# Altium PCB 天地通门禁2074.PcbDoc (part 1 of 2)
Units mil, origin at the board's own origin, x right, y up, seen from the top; angles counter-clockwise.
Board outline 4047 x 2860 mil, 2 copper layers (Top Layer, Bottom Layer); 106 components, 66 nets, 310 pads, 377 vias.
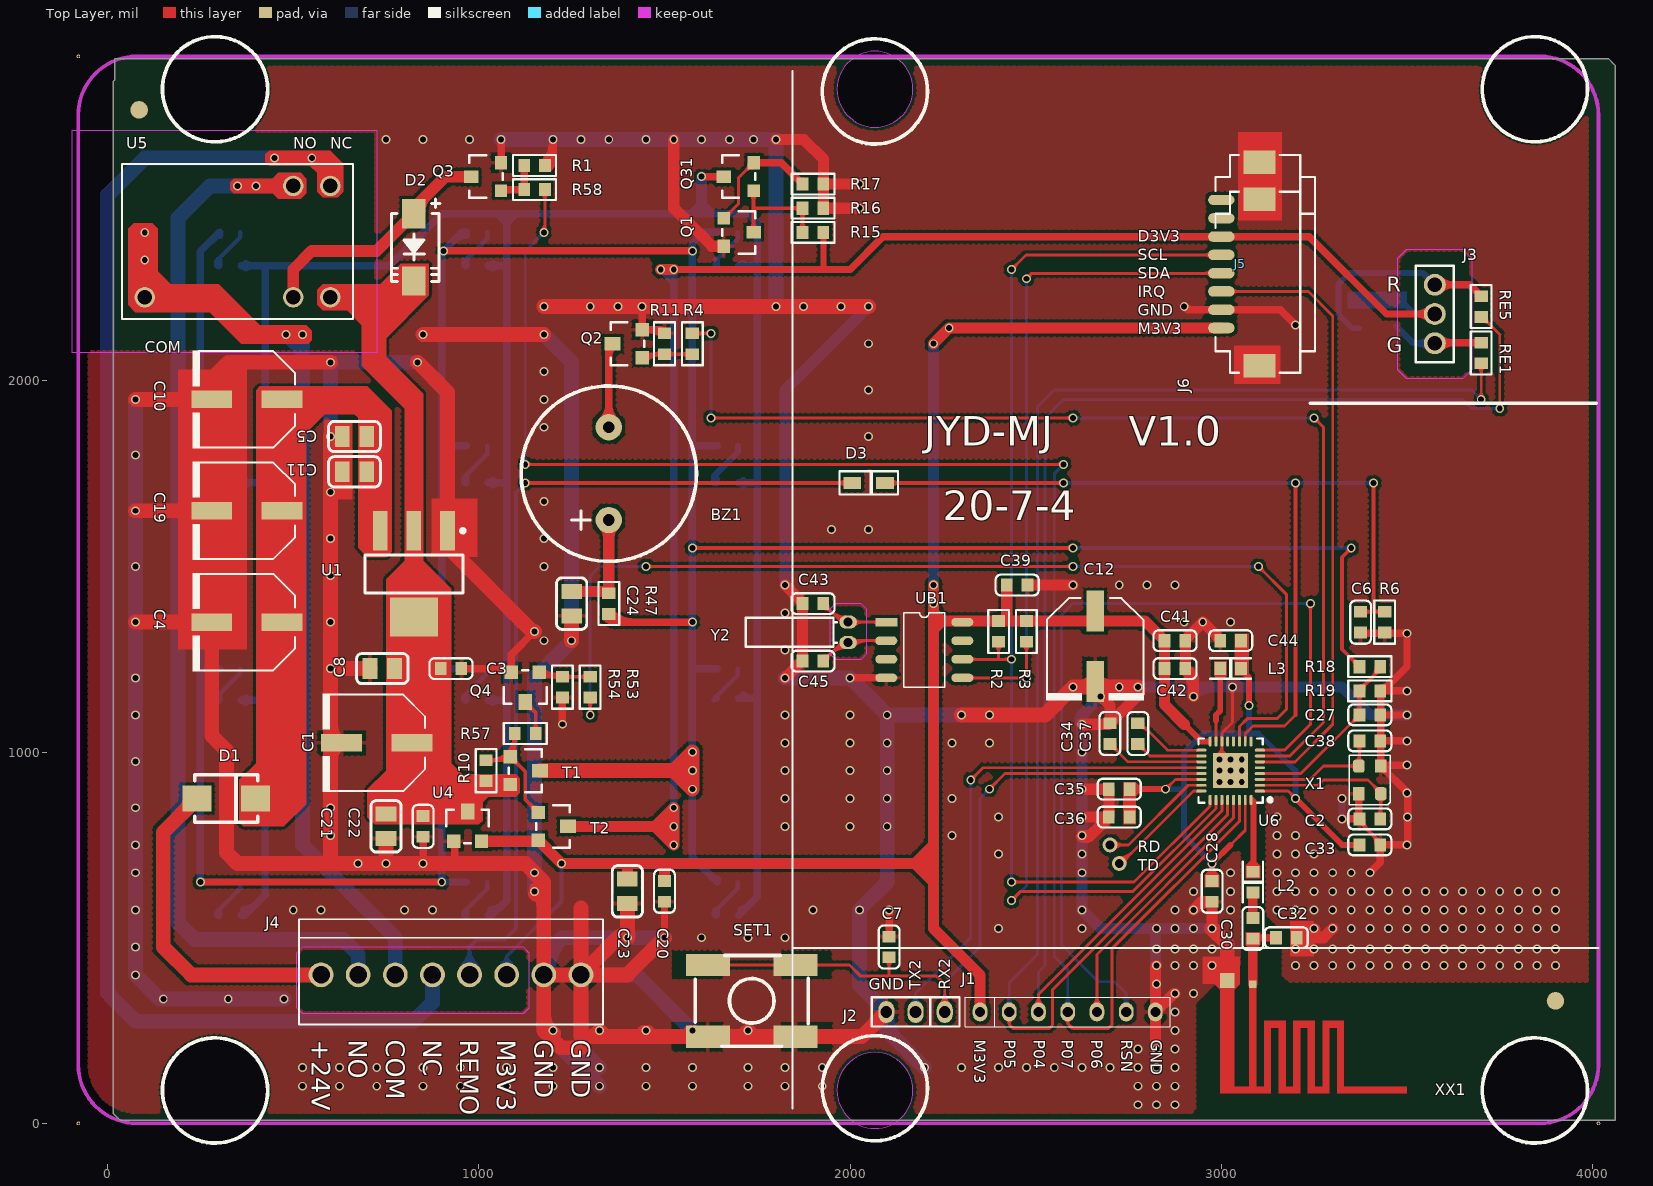
[diagram p0: Top Layer view]
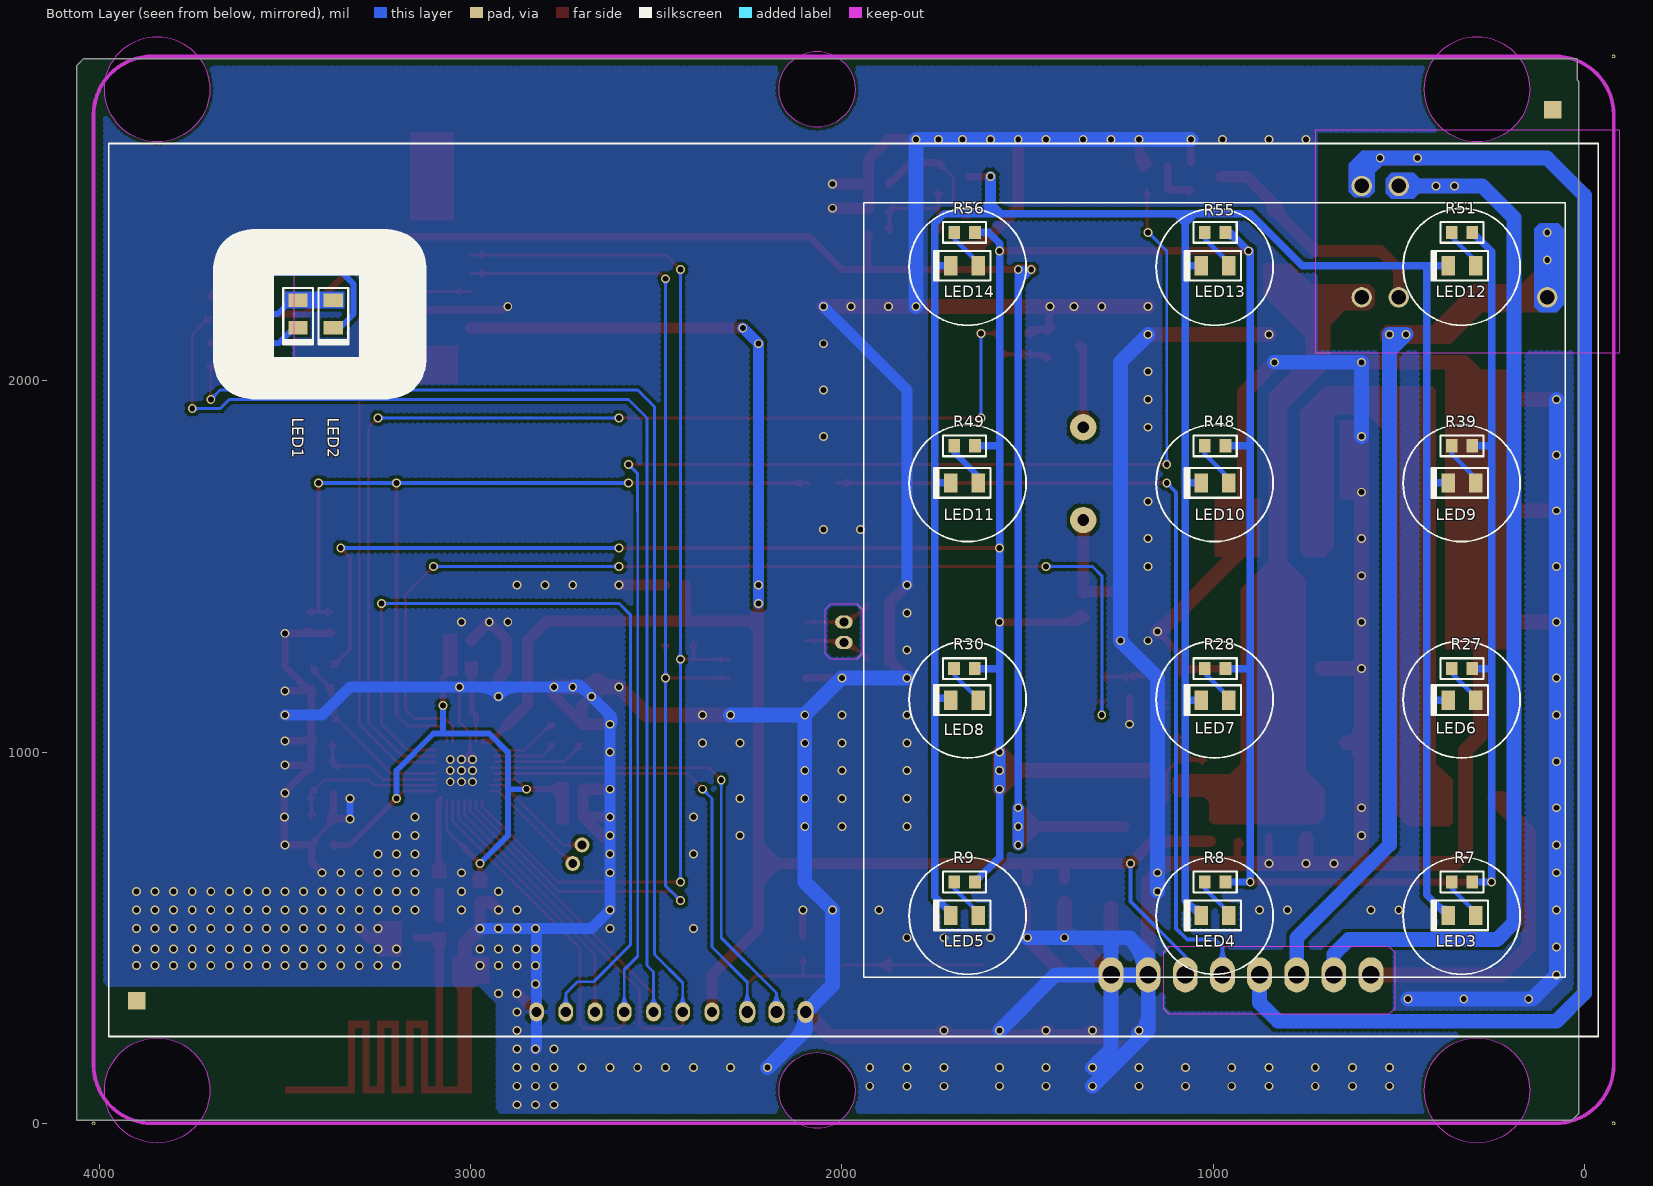
[diagram p1: Bottom Layer view, seen from below]
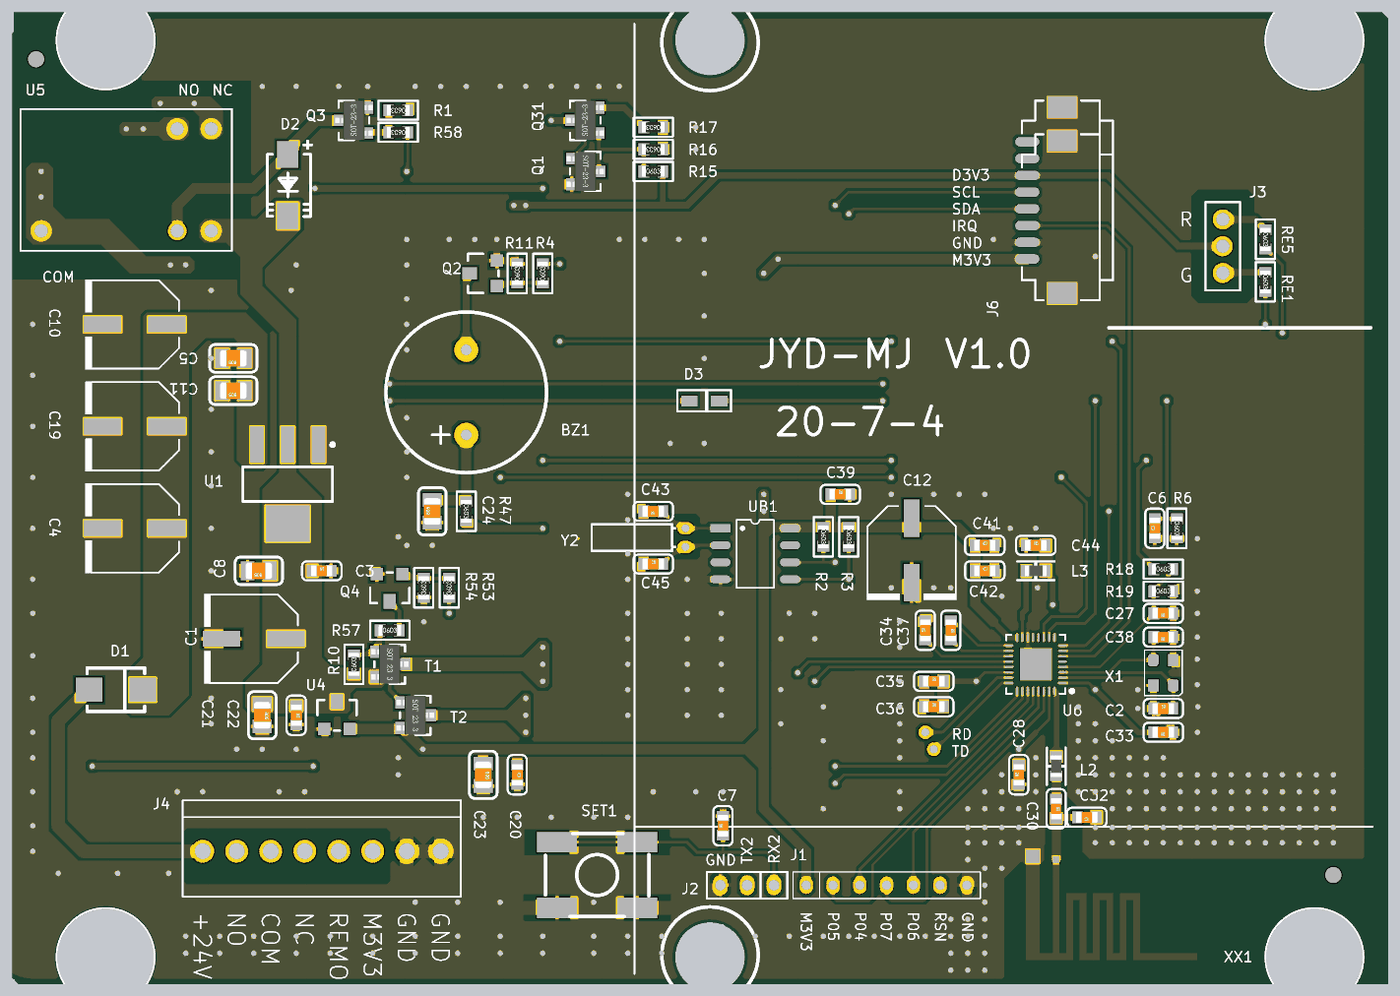
[diagram p3: 3D render of the assembled board from above, using the file's embedded part models]
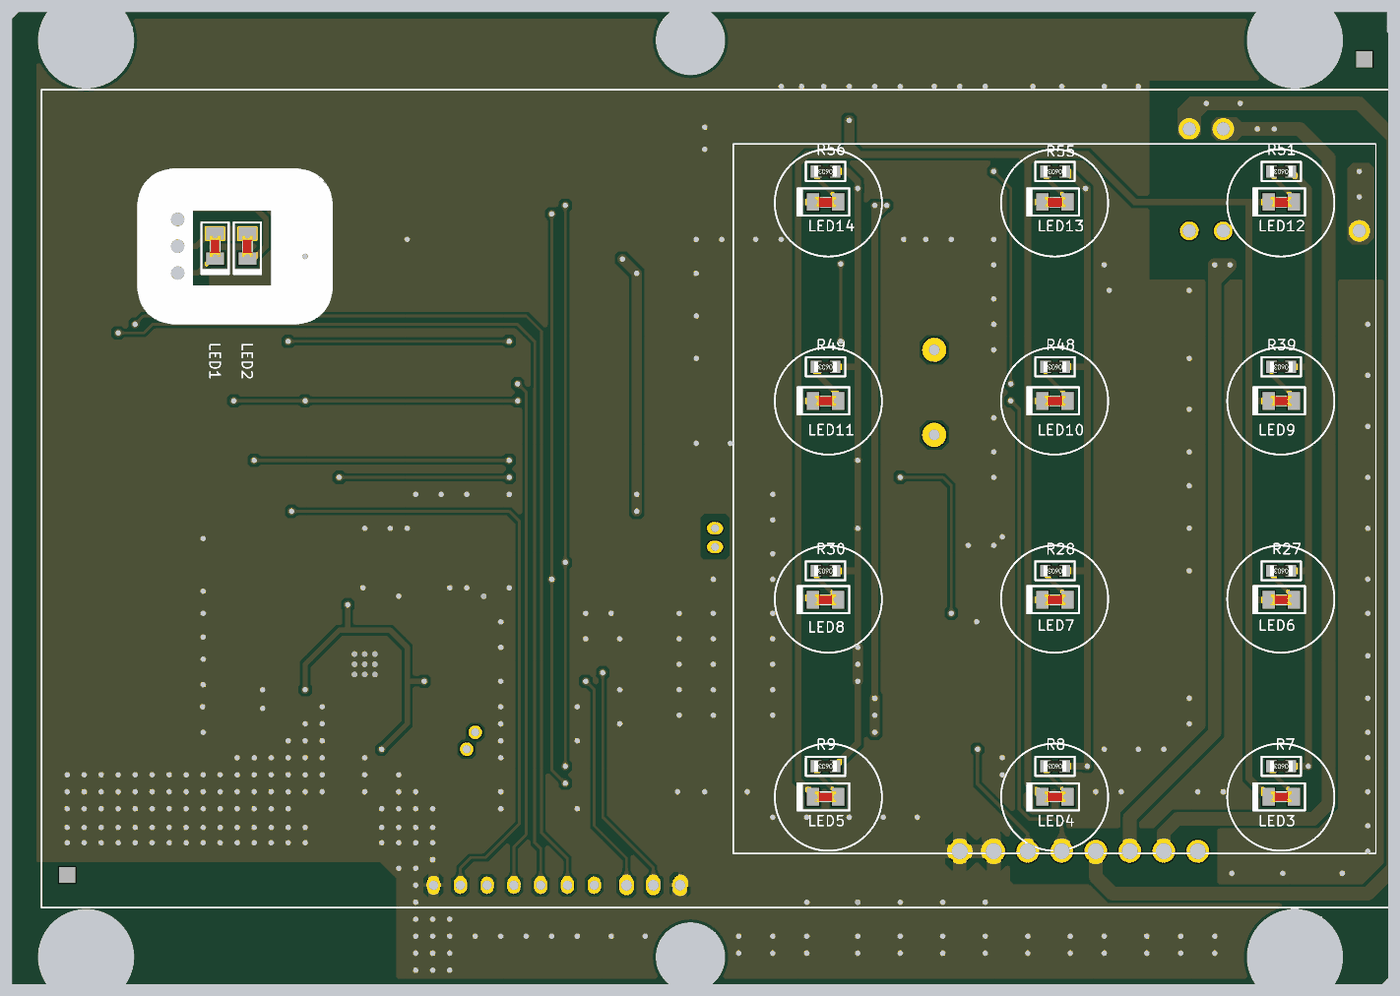
[diagram p4: 3D render of the assembled board from below, using the file's embedded part models]

## Layer stack, top to bottom
Top Layer: signal copper 1.4
Dielectric: core 12.6, FR-4, Dk 4.8
Bottom Layer: signal copper 1.4

## Board outline
19.68,2811.25 14.68,2806.25 14.68,27.25 33.68,8.25 4061.68,8.25 4061.68,2849.25 4056.68,2854.25 4042.68,2868.25 18.68,2868.25
cut-out: 2066.93,190.94 ccw(c2066.93,88.58) 1964.57,88.58 ccw(c2066.93,88.58) 2066.93,-13.78 ccw(c2066.93,88.58) 2169.29,88.58 ccw(c2066.93,88.58)
cut-out: 2066.93,2887.8 ccw(c2066.93,2785.43) 1964.57,2785.43 ccw(c2066.93,2785.43) 2066.93,2683.07 ccw(c2066.93,2785.43) 2169.29,2785.43 ccw(c2066.93,2785.43)
cut-out: 289.37,230.31 ccw(c289.37,88.58) 147.64,88.58 ccw(c289.37,88.58) 289.37,-53.15 ccw(c289.37,88.58) 431.1,88.58 ccw(c289.37,88.58)
cut-out: 289.37,2927.17 ccw(c289.37,2785.43) 147.64,2785.43 ccw(c289.37,2785.43) 289.37,2643.7 ccw(c289.37,2785.43) 431.1,2785.43 ccw(c289.37,2785.43)
cut-out: 3844.49,2927.17 ccw(c3844.49,2785.43) 3702.76,2785.43 ccw(c3844.49,2785.43) 3844.49,2643.7 ccw(c3844.49,2785.43) 3986.22,2785.43 ccw(c3844.49,2785.43)
cut-out: 3844.49,230.31 ccw(c3844.49,88.58) 3702.76,88.58 ccw(c3844.49,88.58) 3844.49,-53.15 ccw(c3844.49,88.58) 3986.22,88.58 ccw(c3844.49,88.58)

## Design rules (kind name [scope] priority, off if disabled: settings)
Clearance Clearance_1 [(InPoly)Or(IsKeepOut) vs (InPoly)Or(IsKeepOut)] p1: gap=20
Clearance [All] p2: gap=7.87
ComponentClearance [All] p1: gap=0 collisioncheckmode=3 verticalgap=0 showdistances=FALSE
FabricationTestpoint [(IsPad And (OnTopLayer Or OnBottomLayer))] p1: side=3 testpointundercomponent=TRUE minsize=40 maxsize=100 preferedsize=60 minholesize=0 maxholesize=40 preferedholesize=32 testpointgrid=1 allowsidetop=TRUE allowsidebottom=TRUE usegrid=TRUE gridtolerance=0.01
HoleSize [All] p1: absolutevalues=TRUE maxlimit=393.7 minlimit=1 maxpercent=80.000 minpercent=20.000
MinimumSolderMaskSliver [All] p1: minsoldermaskwidth=0
PolygonConnect PolygonConnect_2 [IsVia] p1: connectstyle=Direct reliefconductorwidth=10 reliefentries=4 polygonreliefangle="90 Angle" airgapwidth=10
PolygonConnect [All] p2: connectstyle=Relief reliefconductorwidth=10 reliefentries=4 polygonreliefangle="90 Angle" airgapwidth=10
RoutingVias [All] p1: holewidth=15.75 width=23.62 viastyle="Through Hole" minholewidth=15.75 minwidth=23.62 maxholewidth=19.68 maxwidth=31.5
SilkToSilkClearance [All] p1: silktosilkclearance=0
SilkToSolderMaskClearance [IsPad] p1: minsilkscreentomaskgap=0 clearancetoexposedcopper=TRUE
SolderMaskExpansion [All] p1: expansion=4
Width [All] p1: maxlimit=78.74 minlimit=3.94 preferedwidth=7.87
22 further rules are at their usual default settings.

## Components (designator, comment, footprint, x,y, rotation, side; value= is the part's Value field where it differs from the comment)
BZ1 "BUZZER" BUZZ_EN 1350,1625 r90 top
C1 "10uF" R6.3*5.8 725,1025 r180 top
C2 "12pF" 0603C 3400,820 r0 top
C3 "0.1uF" 0603C 925,1225 r0 top
C4 "47uF/50V" R6.3*7.7 375,1350 r180 top (schematic designator C2)
C5 "0.1uF/50V" 0805C 665,1850 r180 top
C6 "10nF" 0603C 3375,1350 r90 top
C7 "1nF/6.3V" 0603C 2105,475 r90 top
C8 "10uF" 0805C 740,1225 r180 top
C10 "100UF/50V" R6.3*7.7 375,1950 r180 top (schematic designator C4)
C11 "0.1uF/50V" 0805C 665,1755 r180 top
C12 "220uF/6.3V" R6.3*5.8 2660,1285 r270 top
C19 "47uF/50V" R6.3*7.7 375,1650 r180 top (schematic designator C3)
C20 "0.1uF" 0603C 1500,625 r270 top
C21 "22uF/10V" 0805C 750,800 r270 top
C22 "0.1uF" 0603C 850,800 r270 top
C23 "10uF/10V" 0805C 1400,625 r270 top
C24 "10uF/10V" 0805C 1250,1400 r90 top
C27 "1nF" 0603C 3400,1100 r180 top
C28 "1uF/6.3V" 0603C 2975,625 r90 top
C30 "1.5pF" 0603C 3085,525 r270 top
C32 "1pF" 0603C 3175,500 r180 top
C33 "0.1uF" 0603C 3400,750 r180 top
C34 "0.1uF" 0603C 2700,1050 r90 top
C35 "1uF" 0603C 2725,900 r0 top
C36 "0.1uF" 0603C 2725,825 r0 top
C37 "0.1uF" 0603C 2775,1050 r270 top
C38 "12pF" 0603C 3400,1030 r180 top
C39 "0.1uF" 0603C 2450,1450 r0 top
C41 "10uF/6.3V" 0603C 2875,1300 r0 top
C42 "0.1uF" 0603C 2875,1225 r0 top
C43 "22pF" 0603C 1900,1400 r180 top
C44 "10uF/6.3V" 0603C 3025,1300 r0 top
C45 "22pF" 0603C 1900,1245 r0 top
D1 "SS14" DO-214AA 319.68,875 r180 top
D2 "1N4001" M7 825,2450 r270 top (schematic designator D7)
D3 "1N4148" SOD-323 2050,1725 r0 top
J1 "7P" 7P-2.0MM 2350,300 r0 top
J2 "Header 3" 3P-2.0MM 2255,300 r180 top (schematic designator P4)
J3 "Header 3" 3PIN-2.0 3575,2180 r270 top
J4 "2.54接插座" 2.54螺丝接线座8P 1275,400 r180 top (schematic designator P1)
J5 "Header 8" 8P-1.25mm 3000,2315 r90 top
J6 "Header 6" 6P-1.25mm 3000,2265 r90 top
L2 "2nH" 0603L 3085,650 r90 top
L3 "2.2uH" 0603L 3025,1225 r180 top
LED1 "Green" 0805LED 3465,2180 r270 bottom
LED2 "Red" 0805LED 3370,2180 r270 bottom
LED3 "Blue" 0805LED 329.68,560 r0 bottom
LED4 "Blue" 0805LED 994.68,560 r0 bottom
LED5 "Blue" 0805LED 1669.68,560 r0 bottom
LED6 "Blue" 0805LED 329.68,1140 r0 bottom
LED7 "Blue" 0805LED 994.68,1140 r0 bottom
LED8 "Blue" 0805LED 1670,1140 r0 bottom
LED9 "Blue" 0805LED 329.68,1725 r0 bottom
LED10 "Blue" 0805LED 994.68,1725 r0 bottom
LED11 "Blue" 0805LED 1669.68,1725 r0 bottom
LED12 "Blue" 0805LED 329.68,2310 r0 bottom
LED13 "Blue" 0805LED 994.68,2310 r0 bottom
LED14 "Blue" 0805LED 1669.68,2310 r0 bottom
Q1 "SS8050" "SOT-23 - BCE" 1700,2400 r270 top (schematic designator Q31)
Q2 "SS8050" SOT-23-3L 1400,2100 r90 top (schematic designator T1)
Q3 "SS8050" "SOT-23 - BCE" 1019.68,2550 r90 top
Q4 "PMBT3904" SOT-23-3L 1125,1175 r180 top (schematic designator T2)
Q31 "SS8050" "SOT-23 - BCE" 1700,2550 r90 top
R1 "15k" 0603R 1150,2580 r180 top
R2 "10K" 0603R 2400,1325 r270 top
R3 "10K" 0603R 2475,1325 r270 top
R4 "1k" 0603R 1575,2100 r90 top
R6 "10K" 0603R 3440,1350 r270 top
R7 "100R" 0603R 329.68,650 r0 bottom
R8 "100R" 0603R 994.68,650 r0 bottom
R9 "100R" 0603R 1669.68,650 r0 bottom
R10 "100K" 0603R 1019.68,950 r90 top
R11 "20K" 0603R 1500,2100 r90 top
R15 "4.7K" 0603R 1900,2400 r0 top
R16 "47K" 0603R 1900,2465 r180 top
R17 "33R" 0603R 1900,2530 r180 top (schematic designator R15)
R18 "510K%1" 0603R 3400,1230 r0 top
R19 "100K%1" 0603R 3400,1165 r0 top
R27 "100R" 0603R 329.68,1225 r0 bottom
R28 "100R" 0603R 994.68,1225 r0 bottom
R30 "100R" 0603R 1670,1225 r0 bottom
R39 "100R" 0603R 329.68,1825 r0 bottom
R47 "10R" 0603R 1350,1400 r270 top
R48 "100R" 0603R 994.68,1825 r0 bottom
R49 "100R" 0603R 1669.68,1825 r0 bottom
R51 "100R" 0603R 329.68,2400 r0 bottom
R53 "4.7K" 0603R 1300,1175 r90 top
R54 "20K" 0603R 1225,1175 r90 top
R55 "100R" 0603R 994.68,2400 r0 bottom
R56 "100R" 0603R 1669.68,2400 r0 bottom
R57 "1K" 0603R 1125,1050 r0 top
R58 "1k" 0603R 1150,2515 r180 top
RE1 "1K" 0603R 3700,2075 r270 top
RE5 "1K" 0603R 3700,2200 r270 top
SET1 "SW-PB" KEY-S 1735,330 r180 top
T1 "SI2301" "SOT-23 - GDS" 1125,950 r270 top (schematic designator Q1)
T2 "SI2301" "SOT-23 - GDS" 1200,800 r270 top (schematic designator Q2)
U1 "AMS1117-5" SOT223_M 825,1480 r270 top
U4 "HT7533" SOT-23-3L 969.68,800 r0 top
U5 "5V" 继电器1X 600,2225 r180 top
U6 "BK3431Q" QFN32_4*4*0.4 3025,950 r180 top
UB1 "PCF8563" SOP8 2200,1275 r0 top
X1 "16MHZ" XTAL3225 3400,925 r90 top
XX1 "TIANX" BT_NAMI_1 3085,375 r180 top
Y2 "32.768KHZ" 晶振-9 1994.68,1295 r90 top

## Footprints (in the part's own frame and the unit in brackets; to place one, negate y for a bottom-side part, rotate by r counter-clockwise, add the part's x,y. Pads: shape width x height; smd on the part's side, far side on the other; paste and mask are expansions set on the pad)
2.54螺丝接线座8P [mm]
  round 1.7 / inner round 1.7 / far side oval 1.7x2.4 hole 1.2: 1(0,0) 2(2.54,0) 3(5.08,0) 4(7.62,0) 5(10.16,0) 6(12.7,0) 7(15.24,0) 8(17.78,0)
  silkscreen extent -1.5,-3.8 19.28,3.4
3P-2.0MM [mm]
  oval 1.1x1.5 hole 0.8 mask+0.05: 1(0,0) 2(2,0) 3(4,0)
  silkscreen extent -1,-1 5,1
3PIN-2.0 [mm]
  round 1.5 hole 1: 1(-2,0) 2(0,0) 3(2,0)
  silkscreen extent -3.3,-1.3 3.3,1.3
6P-1.25mm [mm]
  oval 0.7x1.8 smd mask+0.05: 1(-3.125,0) 2(-1.875,0) 3(-0.625,0) 4(0.625,0) 5(1.875,0) 6(3.125,0)
  rect 1.6x2.2 smd mask+0.05: 7(-5.7,-2.6) 8(5.7,-2.6)
  silkscreen extent -6.2,-6.4 6.2,0.4
7P-2.0MM [mm]
  oval 1x1.3 hole 0.7 mask+0.05: 1(0,0) 2(2,0) 3(4,0) 4(6,0) 5(8,0) 6(10,0) 7(12,0)
  silkscreen extent -1,-1 13,1
8P-1.25mm [mm]
  oval 0.7x1.8 smd mask+0.05: 1(-4.375,0) 2(-3.125,0) 3(-1.875,0) 4(-0.625,0) 5(0.625,0) 6(1.875,0) 7(3.125,0) 8(4.375,0)
  rect 1.6x2.2 smd mask+0.05: 9(-6.95,-2.6) 10(6.95,-2.6)
  silkscreen extent -7.45,-6.4 7.45,0.4
0603C [mm]
  rect 0.8x0.9 smd: 1(-0.711,0) 2(0.711,0)
  silkscreen extent -1.47,-0.71 1.47,0.71, body extent -0.8,-0.4 0.8,0.4, height 0.3
0603L [mm]
  rect 0.8x0.9 smd: 1(-0.711,0) 2(0.711,0)
  silkscreen extent -1.4,-0.7 1.4,0.7, body extent -0.82,-0.41 0.83,0.41, height 0.46
0603R [mm]
  rect 0.8x0.9 smd: 1(-0.711,0) 2(0.711,0)
  silkscreen extent -1.47,-0.71 1.47,0.71, body extent -0.85,-0.4 0.85,0.4, height 0.56
0805C [mil]
  rect 40x56 smd: 1(-33,0) 2(33,0)
  silkscreen extent -70,-41 70,41, body extent -39,-25 39,25, height 30
0805LED [mil]
  rect 36x52 smd: 1(-37,0) 2(37,0)
  silkscreen extent -70,-40 82,40, body extent -31,-16 31,16, height 24
BT_NAMI_1 [mm]
  rect 0.5x0.5 smd: 1(0,0)
  rect 1x1 smd: 2(1.75,-0.25)
  Top Layer region: -10.55,7 -5.75,7 -5.75,7.5 -10.55,7.5
  Top Layer region: -6.25,2.5 -5.75,2.5 -5.75,7.5 -6.25,7.5
  Top Layer region: -6.25,2.5 -4.75,2.5 -4.75,3 -6.25,3
  Top Layer region: -5.25,2.5 -4.75,2.5 -4.75,7.5 -5.25,7.5
  Top Layer region: -5.25,7 -3.75,7 -3.75,7.5 -5.25,7.5
  Top Layer region: -4.25,2.5 -3.75,2.5 -3.75,7.5 -4.25,7.5
  Top Layer region: -4.25,2.5 -2.75,2.5 -2.75,3 -4.25,3
  Top Layer region: -3.25,2.5 -2.75,2.5 -2.75,7.5 -3.25,7.5
  Top Layer region: 1.25,0 2.25,0 2.25,7.5 1.25,7.5
  Top Layer region: -0.25,0 0.25,0 0.25,7.5 -0.25,7.5
  Top Layer region: -1.25,7 2.25,7 2.25,7.5 -1.25,7.5
  Top Layer region: -1.25,2.5 -0.75,2.5 -0.75,7.5 -1.25,7.5
  Top Layer region: -2.25,2.5 -0.75,2.5 -0.75,3 -2.25,3
  Top Layer region: -2.25,2.5 -1.75,2.5 -1.75,7.5 -2.25,7.5
  Top Layer region: -3.25,7 -1.75,7 -1.75,7.5 -3.25,7.5
BUZZ_EN [mm]
  round 1.8 hole 0.8: 1(0,0) 2(6.35,0)
  silkscreen extent -2.82,-6 9.17,6
DO-214AA [mm]
  rect 2x1.8 smd: 1(2,0) 2(-2,0)
  silkscreen extent -2.15,-1.63 2.15,1.63
KEY-S [mm]
  rect 3x1.524 smd: 1(3,2.45) 1/2(-3,2.45) 2(-3,-2.45) 2/2(3,-2.45)
  silkscreen extent -3.86,-3.1 3.86,3.1
M7 [mm]
  rect 2x1.6 smd: A(0,0) K(4.6,0)
  silkscreen extent -1,-1.53 4.64,1.78
QFN32_4*4*0.4 [mm]
  rect 2.4x2.4 smd paste-0.025 mask+0.051: 0(0,0)
  oval 0.7x0.2 smd paste-0.025 mask+0.051: 1(-2,1.4) 2(-2,1) 3(-2,0.6) 4(-2,0.2) 5(-2,-0.2) 6(-2,-0.6) 7(-2,-1) 8(-2,-1.4) 17(2,-1.4) 18(2,-1) 19(2,-0.6) 20(2,-0.2) 21(2,0.2) 22(2,0.6) 23(2,1) 24(2,1.4)
  oval 0.2x0.7 smd paste-0.025 mask+0.051: 9(-1.4,-2) 10(-1,-2) 11(-0.6,-2) 12(-0.2,-2) 13(0.2,-2) 14(0.6,-2) 15(1,-2) 16(1.4,-2) 25(1.4,2) 26(1,2) 27(0.6,2) 28(0.2,2) 29(-0.2,2) 30(-0.6,2) 31(-1,2) 32(-1.4,2)
  silkscreen extent -2.82,-2.2 2.2,2.2
R6.3*5.8 [mm]
  rect 2.8x1.2 smd: 1(-2.4,0) 2(2.4,0)
  silkscreen extent -3.3,-3.36 3.7,3.36
R6.3*7.7 [mm]
  rect 2.8x1.2 smd: 1(-2.4,0) 2(2.4,0)
  silkscreen extent -3.3,-3.36 3.7,3.36
SOD-323 [mil]
  rect 48x32 smd mask+1.97: 1(-44,0) 2(44,0)
  silkscreen extent -79,-31 79,31
SOP8 [mm]
  rect 1.5x0.6 smd mask+0.05: 1(-2.6,1.905)
  oval 1.5x0.6 smd mask+0.05: 2(-2.6,0.635) 3(-2.6,-0.635) 4(-2.6,-1.905) 5(2.6,-1.905) 6(2.6,-0.635) 7(2.6,0.635) 8(2.6,1.905)
  round 0.4 on Top Overlay mask+0.05: ""(-0.949,1.905)
  silkscreen extent -1.4,-2.54 1.4,2.54
SOT223_M [mm] "SOT223, 4-Leads, Body 6.5x3.5mm, Pitch 2.3mm, Lead Span 7mm, IPC Low Density"
  rect 2.7x1 smd: 1(-2.95,2.3) 2(-2.95,0) 3(-2.95,-2.3)
  rect 2.7x3.3 smd: 4(2.95,0)
  silkscreen extent -3.07,-3.35 1.3,3.48, body extent -1.85,-3.35 1.85,3.35, height 1.7
"SOT-23 - BCE" [mm]
  rect 0.85x0.85 smd: B(-0.95,-1.016)
  rect 0.85x1 smd: C(0,1.016)
  rect 0.914x0.85 smd: E(0.95,-1.016)
  silkscreen extent -1.46,-1.14 1.46,1.14, body extent -1.45,-1.4 1.45,1.4, height 1.2
"SOT-23 - GDS" [mil]
  rect 36x43.31 smd: D(0,40)
  rect 36x36 smd: G(-37.4,-40) S(37.4,-40)
  silkscreen extent -57,-45 58,45, body extent -57,-55 57,55, height 47
SOT-23-3L [mil]
  rect 36x36 smd: 1(-37.4,-40) 2(37.4,-40)
  rect 36x43.31 smd: 3(0,40)
  silkscreen extent -57,-45 58,45
XTAL3225 [mm]
  rrect50% 0.9x0.8 smd: 1(-0.95,-0.75) 3(0.95,0.75)
  rect 0.9x0.8 smd: 2(0.95,-0.75) 4(-0.95,0.75)
  silkscreen extent -1.7,-1.4 1.7,1.4
晶振-9 [mm]
  oval 0.9x1.2 hole 0.6: 1(0,0) 2(1.4,0)
  rect 0x0 smd: 3(0.635,8)
  silkscreen extent -0.3,0.76 1.7,7
继电器1X [mm]
  round 1.4 hole 1: 1(0,-7.62) 2(0,0) 3(2.54,-7.62) 4(2.54,0) 5(12.7,0)
  silkscreen extent -1.55,-9.11 14.25,1.49

## Part data
BZ1: "Buzzer"
C1 C4 C8 C10 C12 C19 C21 C23: library part CAP-P, "Capacitor, tolerance ±20%"
C2 C6 C7 C28 C30 C32 C33 C34 C35 C36 C37 C38 C41 C42 C44: library part Cap, "Capacitor"
C3 C5 C11: library part "CAP NP"
C20 C22 C27: library part CAP-NP, "Capacitor, Ceramic"
C24: library part C_0_Dup1
C39 C43 C45: library part C
D1 D2 D3: library part D
J2 J3: "Header, 3-Pin"
J4: library part "Header 8", "Header, 8-Pin"
J5: "Header, 8-Pin"
J6: "Header, 6-Pin"
L2 L3: "Power Inductor, 4.7uH, 0.7A, 260mR DCR"
LED1 LED2 LED3 LED4 LED5 LED6 LED7 LED8 LED9 LED10 LED11 LED12 LED13 LED14: library part LED
Q1 Q3 Q31: library part PMBT3904
Q2 Q4: library part NPN_BJT, "Bipolar Junction Transistor"
R1 R6 R7 R8 R9 R10 R15 R16 R17 R27 R28 R30 R39 R48 R49 R51 R53 R54 R55 R56 R57 R58 RE1 RE5: library part R
R2 R3: library part RES
R4 R11 R47: library part R_Dup1
R18 R19: library part Res2, "Resistor"
SET1: "Switch"
T1 T2: library part PWRMOSFET_EP_DGS_0
U1 U4: library part XC6206P302M
U5: library part OMRON_G8P-1A4P
UB1: library part IC8
Y2: library part 晶振

## Free pads (board coordinates)
  round 10 hole 5: 1(-78.74,0) 2(-78.74,2874.02) 3(4015.75,0)
  round 40 hole 24: 1(2725,700) 2(2700,750)
  round 39.37 hole 118.11 unplated: 4(289.37,2785.43) 5(289.37,88.58) 6(2066.93,2785.43) 7(2066.93,88.58) 8(3844.49,2785.43) 9(3844.49,88.58)
  round 47.24 smd: MARK(85,2730) MARK(3900,330)
  rect 47.24x47.24 smd far side: MARK(85,2730) MARK(3900,330)

## Via types
v1: diameter 24, hole 16, Top Layer to Bottom Layer, tented both sides, 377 vias

## Nets (pads, with @x,y where several pads share a name; then routed paths per layer and width w, separated by ;. In a path a pad name is that pad's centre, name@x,y a point inside that pad or via, vN(x,y) a via of type N, cw(c..) or ccw(c..) an arc to the next point about the centre after c; other vN are vias at no path point)
5V: C1.1 C3.1 C8.1 C21.1 C22.1 D2.K R10.1 T1.S U1.2 U1.4 U4.3 U5.2 | length 2683.9
  Top Layer w40: U5.2@600,2225 725,2225 ; C21.1@750,833 750,875 787.6,912.6 850,912.6 ; 791.93,2235.83 cw(c825,2202.76) D2.K@825,2249.53 ; U1.4@801.56,1387.3 ccw(c744.97,1443.89) 825,1443.89 ccw(c905.03,1443.89) U1.4@848.44,1387.3 ; U1.4@813.37,1340.42 cw(c724.94,1251.99) 850,1251.99 ; D2.K@816.09,2268.28 cw(c725.01,2342.47) 725.01,2225 ; D2.K@825,2268.9 781.1,2225 725,2225 ; C1.1@827.58,1024.78 ccw(c773.47,1078.89) 850,1078.89 ; C1.1@827.58,1025.22 cw(c773.47,971.11) 850,971.11 ; C22.1@850,828 850,912.6 ; C3.1@897,1225 850,1225 ; U4.3@969.68,840 969.68,912.6 ; T1.S@1079.68,912.6 969.68,912.6 ; 725,2225 725,2050 825,1950 U1.2@825,1596.14 825,1383.86 850,1358.86 850,1225 ; 850,912.6 969.68,912.6 ; 850,912.6 850,1225
20V: C4.1 C5.1 C10.1 C11.1 C19.1 D1.2 U1.3 | length 1906.6
  Top Layer w31.5: D1.2@398.43,875 475,951.57 475,1939.17 464.17,1950 680,1950 734.45,1895.55 734.45,1850 U1.3@734.45,1616.14 ; D1.2@402.36,894.68 ccw(c402.36,932.7) D1.2@429.25,905.82 ; D1.2@422.05,875 cw(c479.08,875) 438.75,915.33 ; C4.1@463.92,1344.43 cw(c437.17,1317.68) 475,1317.68 ; C4.1@463.92,1355.57 ccw(c437.17,1382.32) 475,1382.32 ; C19.1@463.92,1644.43 cw(c437.17,1617.68) 475,1617.68 ; C19.1@463.92,1655.57 ccw(c437.17,1682.32) 475,1682.32 ; C10.1@463.92,1944.43 cw(c437.17,1917.68) 475,1917.68
24V: D1.1 J4.8 | length 930.5
  Top Layer w40: D1.1@207.88,841.93 ccw(c174.81,875) D1.1@221.57,875 ; D1.1@240.94,875 150,784.06 150,475 225,400 J4.8@575,400
BAT_ADC: C27.2 R18.2 R19.1 U6.4 | length 704.7
  Top Layer w7.87: U6.4@3093.74,942.13 3214.13,942.13 C27.2@3372,1100 ; 3348.48,1076.48 cw(c3372,1052.95) C27.2@3372,1086.22 ; 3353.23,1081.23 ccw(c3336.43,1098.03) C27.2@3360.19,1098.03
  Top Layer w10: C27.2@3364.4,1109.57 ccw(c3346.05,1127.92) 3372,1127.92 ccw(c3397.95,1127.92) C27.2@3379.6,1109.57 ; R19.1@3364.4,1155.43 cw(c3346.05,1137.08) 3372,1137.08 cw(c3397.95,1137.08) R19.1@3379.6,1155.43 ; C27.2@3372,1100 R19.1@3372,1165 3372,1167 3428,1223 R18.2@3428,1230 ; R19.1@3372,1177.72 ccw(c3372,1203.59) 3390.29,1185.29 ; R19.1@3382.75,1166.97 cw(c3408.77,1166.97) 3390.37,1185.37 ; 3406.09,1201.09 ccw(c3379.16,1228.03) R18.2@3417.25,1228.03 ; R18.2@3418.24,1213.24 cw(c3428,1203.48) R18.2@3428,1217.28
BEEP: R4.2 U6.7 | length 3239.6
  Top Layer w7.87: U6.7@3093.74,989.37 3184.37,989.37 3275,1080 3275,1875 v1(3250,1900) ; v1@3250,1891.94 cw(c3250,1872.47) 3263.76,1886.24 cw(c3277.53,1900) v1@3258.06,1900
  Top Layer w8: R4.2@1575,2128 v1(1625,2128) ; R4.2@1585.28,2119.69 cw(c1605.33,2099.64) 1605.33,2128 cw(c1605.33,2156.36) R4.2@1585.28,2136.31 ; v1@1619.34,2122.34 ccw(c1605.69,2108.69) 1605.69,2128 ccw(c1605.69,2147.31) v1@1619.34,2133.66 ; v1(1625,1900) v1(2600,1900) ; v1@1630.66,1894.34 cw(c1644.31,1880.69) 1644.31,1900 cw(c1644.31,1919.31) v1@1630.66,1905.66 ; v1@2594.34,1894.34 ccw(c2580.69,1880.69) 2580.69,1900 ccw(c2580.69,1919.31) v1@2594.34,1905.66
  Bottom Layer w8: v1@1619.34,1905.66 ccw(c1605.69,1919.31) 1625,1919.31 ccw(c1644.31,1919.31) v1@1630.66,1905.66 ; v1@1619.34,2122.34 cw(c1605.69,2108.69) 1625,2108.69 cw(c1644.31,2108.69) v1@1630.66,2122.34 ; v1(1625,1900) v1(1625,2128) ; v1(2600,1900) v1(3250,1900) ; v1@2605.66,1894.34 cw(c2619.31,1880.69) 2619.31,1900 cw(c2619.31,1919.31) v1@2605.66,1905.66 ; v1@3244.34,1894.34 ccw(c3230.69,1880.69) 3230.69,1900 ccw(c3230.69,1919.31) v1@3244.34,1905.66
COM: J4.6 U5.5 | length 2403.6
  Top Layer w39.37: U5.5@100,2225 285,2225 385,2125 v1(480,2125) v1(525,2125)
  Bottom Layer w39.37: J4.6@775,400 775,500 525,750 525,2080 ; 525,2080 v1(480,2125) v1(525,2125) 525,2080
  other v1: 100,2325 100,2400
GND: C1.2 C2.1 C3.2 C4.2 C5.2 C6.1 C7.2 C8.2 C10.2 C11.2 C12.2 C19.2 C20.2 C21.2 C22.2 C23.2 C24.1 C27.1 C28.1 C30.2 C32.1 C32.2 C33.1 C34.2 C35.1 C36.1 C38.1 C39.2 C41.2 C42.2 C43.2 C44.1 C45.1 J1.7 J2.3 J4.1 J4.2 J5.2 J5.9 J5.10 J6.2 J6.7 J6.8 Q1.E Q2.2 Q3.E Q4.2 R1.1 R6.2 R11.2 R16.1 R17.1 R19.2 R54.1 SET1.1 SET1.1/2 U1.1 U4.1 U6.0 U6.14 UB1.4 X1.2 X1.4 XX1.1 XX1.2 | length 29770.4
  Top Layer w7.87: U6.0@2989.3,985.7 ccw(c2960.14,1014.86) 3001.38,1014.86 ; U6.0@2994.87,980.13 ccw(c2979.15,995.85) U6.0@3001.38,995.85 ; U6.0@3001.38,973.62 U6.14@3001.38,1028.74 3001.38,1051.38 3030,1080 v1(3030,1175) ; v1@3024.3,1169.3 cw(c3010.53,1155.53) 3030,1155.53 cw(c3049.47,1155.53) v1@3035.7,1169.3
  Top Layer w10: C2.1@3372,807.28 cw(c3372,793.48) C2.1@3381.76,803.24 ; C2.1@3372,820 3372,813 3428,757 C33.1@3428,750 ; C2.1@3382.75,818.03 ccw(c3420.84,818.03) 3393.91,791.09 ; 3406.09,778.91 cw(c3379.16,751.97) C33.1@3417.25,751.97 ; C33.1@3418.24,766.76 ccw(c3428,776.52) C33.1@3428,762.72
  Top Layer w19.68: v1(850,700) C22.2@850,772 ; U4.1@926.51,754.23 cw(c906.03,733.75) 935,733.75 ; U4.1@932.28,760 935,757.28 935,700 ; v1(2000,1200) UB1.4@2097.64,1200
  Top Layer w20: C3.2@953,1225 Q4.2@1087.6,1225 ; 1044.14,1225 cw(c1044.14,1171.54) Q4.2@1081.94,1209.34 ; Q3.E@1054.92,2593.43 ccw(c1042.67,2605.68) 1060,2605.68 ; Q3.E@1059.68,2587.4 1060,2587.72 v1(1060,2650) ; Q4.2@1081.94,1220.66 ccw(c1068.28,1234.31) 1087.6,1234.31 ccw(c1106.91,1234.31) Q4.2@1093.25,1220.66 ; Q4.2@1087.6,1215 Q4.2@1087.6,1225 ; v1(1150,1325) 1087.6,1262.6 Q4.2@1087.6,1225 ; R1.1@1173.94,2586.03 ccw(c1111.01,2648.96) v1@1200,2648.96 ; R1.1@1178,2580 1200,2602 v1(1200,2650) ; R1.1@1178,2587.72 ccw(c1178,2606.35) R1.1@1191.17,2593.17 ; R1.1@1188.08,2571.89 ccw(c1159.29,2600.67) 1200,2600.67 ; v1(1225,1075) R54.1@1225,1147 ; Q2.2@1434.34,2143.06 ccw(c1420.69,2156.72) 1440,2156.72 ccw(c1459.31,2156.72) 1445.66,2143.06 ccw(c1459.31,2156.72) 1459.31,2137.4 ccw(c1459.31,2118.09) Q2.2@1445.66,2131.75 ; v1(1440,2200) Q2.2@1440,2137.4 1490.6,2137.4 R11.2@1500,2128 ; 1461.46,2137.4 cw(c1461.46,2091.42) R11.2@1493.97,2123.94 ; v1(1500,500) C20.2@1500,597 ; C7.2@2105,503 v1(2105,575) ; v1(2900,2200) 2908.82,2191.18 J6.2@3000,2191.18 3158.82,2191.18 v1(3200,2150) ; v1@2901.41,2201.41 ccw(c2926.12,2226.12) 2926.12,2191.18 ; C30.2@3085,497 3088,500 C32.2@3147,500 ; C30.2@3091.03,492.94 cw(c3108.09,475.88) 3108.09,500 ; v1(3325,820) C2.1@3372,820 3370.47,821.53 X1.4@3370.47,887.6 ; 3370.47,839.53 ccw(c3389.56,839.53) C2.1@3376.06,826.03 ; C6.1@3375,1322 3377,1320 v1(3500,1320) 3500,1230 R19.2@3435,1165 ; C6.1@3381.03,1326.06 ccw(c3395.67,1340.71) 3395.67,1320 ; v1(3400,675) 3428,703 C33.1@3428,750 v1(3500,750) 3501.62,751.62 3501.62,890.31 X1.2@3429.53,962.4 ; 3419.33,1320 ccw(c3419.33,1340.71) R6.2@3433.97,1326.06 ; C38.1@3423.94,1023.97 cw(c3410.44,1010.47) 3429.53,1010.47 ; C38.1@3423.94,1036.03 ccw(c3410.44,1049.53) 3429.53,1049.53 ; C27.1@3423.94,1093.97 cw(c3410.44,1080.47) 3429.53,1080.47 ; C27.1@3423.94,1106.03 ccw(c3410.44,1119.53) 3429.53,1119.53 ; R19.2@3423.94,1158.97 cw(c3410.44,1145.47) 3429.53,1145.47 ; C27.1@3428,1100 C27.1@3429.53,1100 ; R19.2@3428,1165 R19.2@3435,1165 ; R19.2@3428,1172.72 ccw(c3428,1208.25) 3453.12,1183.12 ; X1.2@3429.53,954.69 cw(c3429.53,936.06) X1.2@3442.7,949.23 ; R6.2@3446.03,1326.06 ccw(c3460.67,1340.71) 3460.67,1320 ; v1(3500,965) 3432.13,965 X1.2@3429.53,962.4 ; v1(3500,1030) C38.1@3429.53,1030 ; v1(3500,1100) C27.1@3429.53,1100 ; v1(3500,1165) R19.2@3435,1165 ; X1.2@3429.53,962.4 C38.1@3429.53,1028.47 ; C38.1@3429.53,1028.47 C38.1@3428,1030 C38.1@3429.53,1030 ; C38.1@3429.53,1028.47 C38.1@3429.53,1030 ; C38.1@3429.53,1030 C27.1@3429.53,1100 ; C27.1@3429.53,1100 3429.53,1159.53 R19.2@3435,1165
  Top Layer w26: XX1.1@3085,375 C30.2@3085,497
  Top Layer w30: v1(1525,2650) 1525,2465 1627.4,2362.6 Q1.E@1660,2362.6 ; v1(1800,2650) 1875,2650 1928,2597 R17.1@1928,2530 ; v1(1825,1200) 1870,1245 C45.1@1872,1245 C43.2@1872,1400 1872,1403 v1(1825,1450) ; v1(2025,2465) R16.1@1928,2465 R17.1@1928,2530 ; v1(2025,2530) R17.1@1928,2530 ; C39.2@2478,1450 v1(2600,1450) ; v1@2623.37,772.48 ccw(c2633.63,788.37) 2647,775 ; v1@2625,772 ccw(c2625,817.87) 2657.44,785.44 ; v1(2625,775) 2647,775 ; v1(2625,825) C36.1@2697,825 ; v1(2625,900) C35.1@2697,900 C36.1@2697,825 ; v1(2625,1075) 2697,1075 C34.2@2700,1078 ; C12.2@2660,1150.39 cw(c2660,1115.13) 2684.93,1140.07 ; C12.2@2675,1180.51 2675,1175 v1(2675,1150) 2700,1125 C34.2@2700,1078 ; 2764.56,1142.56 ccw(c2732.13,1175) v1@2778,1175 ; v1(2775,1175) 2775,1153 ; v1@2777.52,1176.63 cw(c2761.63,1166.37) 2775,1153 ; J1.7@2822.44,310.59 ccw(c2822.44,336.16) 2840.52,318.08 ; v1(2825,200) 2822.44,202.56 J1.7@2822.44,300 ; v1(2825,425) 2822.44,422.44 J1.7@2822.44,300 ; v1(2875,350) 2872.44,350 J1.7@2822.44,300 ; C42.2@2902.47,1222.5 cw(c2848.08,1168.11) 2925,1168.11 ; C42.2@2902.76,1222.32 cw(c2892.08,1191.18) 2925,1191.18 ; v1(2925,575) 2947,597 C28.1@2975,597 v1(2975,525) ; v1(2925,1150) 2925,1200 2903,1222 C42.2@2903,1225 C41.2@2903,1300 2903,1303 v1(2950,1350) 2997,1303 C44.1@2997,1300 ; v1@2927.32,577.32 cw(c2973.03,531.6) C28.1@2973.03,596.25 ; v1@3247.02,524.62 ccw(c3275,528.2) 3275,500 ; v1@3252.3,523.08 cw(c3203,564.2) C32.1@3203,500 3275,500 ; v1(3300,525) 3275,500 ; 2647,775 C36.1@2697,825 ; C34.2@2700,1078 2775,1153
  Top Layer w40: v1(75,1350) C4.2@280.51,1350 ; v1(75,1650) C19.2@280.51,1650 ; v1(75,1950) C10.2@280.51,1950 ; 600,700 v1(600,775) v1(600,850) C1.2@600,1025 ; 600,971.11 cw(c676.53,971.11) C1.2@622.42,1025.22 ; C1.2@600,1002.36 cw(c622.95,1002.36) C1.2@622.63,1025.31 ; 600,1078.89 ccw(c676.53,1078.89) C1.2@622.42,1024.78 ; 600,1669.75 cw(c709.25,1669.75) C11.2@632,1747 ; 600,1764.75 cw(c709.25,1764.75) C5.2@632,1842 ; v1@600,1840.25 ccw(c709.25,1840.25) C11.2@632,1763 ; v1(600,2050) 325,2050 280.51,2005.51 C10.2@280.51,1950 ; C11.2@632,1755 600,1755 ; C5.2@632,1850 v1(600,1850) 600,1755 ; C1.2@640,1025 C1.2@600,1025 ; C8.2@707,1225 v1(600,1225) ; C21.2@750,767 v1(750,700) ; v1(835,2050) 915.55,1969.45 U1.1@915.55,1596.14 915.55,1553.75 1144.3,1325 v1(1150,1325) ; v1(850,2125) v1(1175,2125) ; v1@1152.94,617.56 ccw(c1140.12,650) 1175,650 ; v1@1155.66,630.66 cw(c1108.96,583.96) 1175,583.96 ; 1175,291.04 ccw(c1241.04,291.04) v1@1194.34,244.34 ; v1(1175,2200) v1(1440,2200) v1(1800,2200) v1(1875,2200) v1(1975,2200) v1(2050,2200) ; v1@1192,250 ccw(c1233.04,250) 1204.02,220.98 ; v1@1201.72,242.19 cw(c1195.49,270.49) 1175,250 ; v1(1250,1300) C24.1@1250,1367 ; 1275,203.54 1221.46,203.54 1175,250 ; 1275,580 J4.1@1275,400 ; 1304.58,233.54 ccw(c1304.58,270.42) v1@1330.66,244.34 ; v1@1319.34,244.34 ccw(c1345.42,270.42) 1345.42,233.54 ; 1370.98,495.98 cw(c1400,466.96) v1@1400,508 ; C23.2@1400,592 v1(1400,500) 1375,500 ; v1@1401.72,507.81 ccw(c1395.49,479.51) 1375,500 ; 1429.58,233.54 ccw(c1429.58,270.42) v1@1455.66,244.34 ; v1@1444.34,244.34 ccw(c1470.42,270.42) 1470.42,233.54 ; v1(1500,500) 1400,400 J4.1@1275,400 ; 1554.58,233.54 ccw(c1554.58,270.42) SET1.1@1580.66,244.34 ; SET1.1@1569.34,244.34 ccw(c1595.42,270.42) SET1.1@1595.42,233.54 ; 1704.58,233.54 ccw(c1704.58,270.42) v1@1730.66,244.34 ; v1@1719.34,244.34 ccw(c1745.42,270.42) 1745.42,233.54 ; J2.3@2097.52,300 2031.06,233.54 1275,233.54 J4.1@1275,400 ; v1(2300,1100) 2525,1100 v1(2600,1175) 2675,1175 v1(2725,1175) v1(2775,1175) ; 2613.81,1175 ccw(c2613.81,1236.7) C12.2@2657.44,1193.07 ; 2633.96,1175 cw(c2633.96,1108.96) C12.2@2680.66,1155.66 ; C12.2@2662.56,1193.07 ccw(c2706.19,1236.7) 2706.19,1175 ; C12.2@2669.34,1155.66 cw(c2716.04,1108.96) v1@2716.04,1175 ; v1(2975,525) 3016.1,483.9 XX1.2@3016.1,384.84 ; C10.2@280.51,1950 280.51,1044.49 320,1005 320,730 350,700 v1(750,700) ; C1.2@600,1025 v1(600,1225) ; v1(600,1225) v1(600,1350) v1(600,1475) v1(600,1575) v1(600,1700) 600,1755 ; v1(750,700) v1(850,700) 935,700 1125,700 v1(1150,675) 1175,650 ; 1175,250 J4.2@1175,400 ; J4.2@1175,400 J4.1@1275,400 ; J4.2@1175,400 1175,650 ; J4.1@1275,400 1375,500
  Bottom Layer w20: v1(3325,820) v1(3325,875)
  Bottom Layer w30: v1(1825,1450) 1825,1975 v1(2050,2200) ; v1@2622,1075 cw(c2675.11,1075) 2637.56,1112.56 ; v1@2622.52,1073.3 cw(c2639.84,1085.16) 2625,1100 ; 2687.44,1162.44 cw(c2725,1124.89) v1@2725,1178 ; v1@2726.7,1177.48 ccw(c2714.84,1160.16) 2700,1175 ; v1(2825,200) 2822.44,202.56 J1.7@2822.44,300 v1@2822.44,525 ; 2871.89,1175 cw(c2871.89,1096.89) v1@2927.12,1152.12 ; v1@2922.88,1152.12 cw(c2978.11,1096.89) 2978.11,1175 ; v1(2925,1150) 2925,1175 ; v1(2975,525) v1(2925,525) v1(2875,525) v1@2822.44,525 ; v1(3500,1100) 3400,1100 3325,1175 v1(3030,1175) 2925,1175 ; 2625,1100 v1(2675,1150) 2700,1175 ; 2625,1100 v1(2625,1075) v1(2625,1000) v1(2625,900) v1(2625,825) v1(2625,775) v1(2625,725) v1(2625,675) v1(2625,575) 2675,525 v1@2822.44,525 ; 2700,1175 v1(2725,1175) v1(2775,1175) 2925,1175
  Bottom Layer w40: v1(75,1950) v1(75,1800) v1(75,1650) v1(75,1500) v1(75,1350) v1(75,1200) v1(75,1100) v1(75,975) v1(75,850) v1(75,750) v1(75,675) v1(75,575) v1(75,475) v1(75,400) 140,335 v1(475,335) ; v1(600,1850) v1(600,2050) v1(835,2050) ; v1(1060,2650) v1(1200,2650) v1(1275,2650) v1(1350,2650) v1(1450,2650) v1(1525,2650) v1(1600,2650) v1(1675,2650) v1(1740,2650) v1(1800,2650) v1(1800,2200) ; v1(1150,625) 1150,1200 v1(1250,1300) 1250,2050 v1(1175,2125) ; 1175,291.04 ccw(c1241.04,291.04) v1@1194.34,244.34 ; J4.2@1186.5,407.87 cw(c1315.95,407.87) 1224.41,499.41 ; v1@1192,250 ccw(c1233.04,250) 1204.02,220.98 ; v1@1201.72,242.19 cw(c1195.49,270.49) 1175,250 ; v1(1325,100) 1175,250 ; v1(1325,150) 1275,200 J4.1@1275,400 ; v1(1500,500) v1(1400,500) 1275,500 ; v1(1575,250) 1425,400 J4.1@1275,400 ; v1(1825,1200) v1(2000,1200) v1(2100,1100) ; J2.3@2099.17,292.13 ccw(c2198.88,292.13) 2128.38,221.62 ; v1(2200,150) 2097.52,252.48 J2.3@2097.52,300 2025,372.52 v1(2025,575) 2100,650 v1(2100,800) v1(2100,875) v1(2100,950) v1(2100,1025) v1(2100,1100) ; v1(2300,1100) v1(2100,1100) ; 1175,250 J4.2@1175,400 ; J4.2@1175,400 1175,450 1225,500 1275,500 ; J4.2@1175,400 J4.1@1275,400 ; J4.1@1275,400 1275,500
  other v1: 2775,50 2825,50 2875,50 525,100 625,100 725,100 850,100 950,100 1075,100 1200,100 1450,100 1575,100 1725,100 1825,100 1925,100 2775,100 2825,100 2875,100 525,150 625,150 725,150 850,150 950,150 1075,150 1200,150 1450,150 1575,150 1725,150 1825,150 1925,150 2300,150 2400,150 2475,150 2550,150 2625,150 2700,150 2775,150 2825,150 2875,150 2775,200 2875,200 1200,250 1325,250 1450,250 1725,250 2875,250 2875,300 150,335 325,335 2925,350 2825,375 2875,425 2925,425 2975,425 3200,425 3250,425 3300,425 3350,425 3400,425 3450,425 3500,425 3550,425 3600,425 3650,425 3700,425 3750,425 3800,425 3850,425 3900,425 2825,470 2875,470 2925,470 2975,470 3200,470 3250,470 3300,470 3350,470 3400,470 3450,470 3500,470 3550,470 3600,470 3650,470 3700,470 3750,470 3800,470 3850,470 3900,470 1600,500 1725,500 1825,500 2400,525 2625,525 2825,525 3250,525 3350,525 3400,525 3450,525 3500,525 3550,525 3600,525 3650,525 3700,525 3750,525 3800,525 3850,525 3900,525 500,575 575,575 800,575 875,575 1900,575 2875,575 3025,575 3150,575 3200,575 3250,575 3300,575 3350,575 3400,575 3450,575 3500,575 3550,575 3600,575 3650,575 3700,575 3750,575 3800,575 3850,575 3900,575 2925,625 3025,625 3150,625 3200,625 3250,625 3300,625 3350,625 3400,625 3450,625 3500,625 3550,625 3600,625 3650,625 3700,625 3750,625 3800,625 3850,625 3900,625 3025,675 3150,675 3200,675 3250,675 3300,675 3350,675 675,700 2400,725 3150,725 3200,725 3250,725 2275,775 3150,775 3200,775 1825,800 2000,800 2400,825 3150,825 3501.62,825 1825,875 2000,875 2275,875 3500,890 2995,920 3025,920 3055,920 1825,950 2000,950 2995,950 3025,950 3055,950 2995,980 3025,980 3055,980 1825,1025 2000,1025 2275,1025 2375,1025 1825,1100 2000,1100 2375,1100 1825,1275 1175,1300 2900,1350 3025,1350 1825,1375 2725,1450 2800,1450 2875,1450 1175,1500 1175,1575 1950,1600 2050,1600 1175,1675 2050,1850 1175,1875 1175,1950 2050,1975 1175,2025 2050,2100 1300,2200 1375,2200 750,2650 850,2650 975,2650
GREEN: J3.3 LED1.2 RE1.1 | length 405.8
  Top Layer w20: J3.3@3575,2101.26 3576.74,2103 RE1.1@3700,2103 ; J3.3@3588.81,2087.45 cw(c3626.34,2049.92) 3626.34,2103 ; J3.3@3588.81,2115.07 ccw(c3617.94,2144.2) 3617.94,2103
  Bottom Layer w16: LED1.2@3470,2148 3516.74,2101.26 J3.3@3575,2101.26 ; J3.3@3559.78,2086.04 ccw(c3523.03,2049.29) 3523.03,2101.26 ccw(c3523.03,2153.23) J3.3@3559.78,2116.48
IRQ_TSM12: J5.3 J6.3 U6.6 | length 1750
  Top Layer w7.87: J6.3@3000,2240.39 3234.61,2240.39 3300,2175 3300,1075 3198.62,973.62 U6.6@3093.74,973.62 ; J6.3@3028.61,2233.43 cw(c3045.42,2216.63) 3045.42,2240.39 cw(c3045.42,2264.16) J6.3@3028.61,2247.35 ; J6.3@3028.61,2234.22 cw(c3043.51,2219.32) 3043.51,2240.39 ; J6.3@3028.61,2248.14 ccw(c3047.32,2266.84) 3047.32,2240.39
IRQ_TSM13: 
M3V3: C12.1 C20.1 C23.1 C39.1 C41.1 C42.1 J1.1 J4.3 J5.1 J6.1 R2.1 R3.1 T2.S U4.2 U6.16 UB1.8 | length 5789.9
  Top Layer w16: 2900,1075 2946.26,1028.74 2965.82,1028.74
  Top Layer w30: U4.2@1007.09,760 1157.4,760 T2.S@1160,762.6 v1(1222.6,700) 1400,700 ; C23.1@1400,658 1400,700 ; C20.1@1500,653 1500,700 ; v1(2225,1450) v1(2225,1400) 2225,1376 ; v1(2225,2100) v1(2266.97,2141.97) J6.1@3000,2141.97 ; 2228,1353 2248,1353 ; J1.1@2350,300 2350,400 2225,525 2225,650 ; 2422,1360 C39.1@2422,1450 ; 2900,1075 2847,1128 C42.1@2847,1225 C41.1@2847,1300 2794,1353 R3.1@2475,1353 R2.1@2400,1353 2248,1353 ; 1400,700 1500,700 ; 1500,700 2175,700 ; 2175,700 2225,750 ; 2175,700 2225,700 ; 2175,700 2225,650 ; 2225,650 2225,700 ; 2225,700 2225,750 ; 2225,750 2225,1330 ; 2225,1330 2248,1353 ; 2225,1330 2225,1376 ; 2225,1376 2248,1353
  Bottom Layer w10: J4.3@1063.53,431.76 ccw(c1054.76,450) 1075,450 ; J4.3@1075,400 1075,450 ; J4.3@1086.47,431.76 cw(c1095.24,450) 1075,450 ; v1@1217.65,695.05 cw(c1205.7,683.1) 1222.6,683.1 cw(c1239.5,683.1) v1@1227.55,695.05 ; v1(1222.6,700) 1222.6,597.6 1075,450
  Bottom Layer w30: v1(2225,1400) v1(2225,1450) v1(2225,2100) v1(2266.97,2141.97)
NC: J4.5 U5.1 | length 3853.6
  Bottom Layer w40: U5.1@600,2525 600,2575 575,2600 v1(550,2600) 475,2600 100,2600 0,2500 0,350 75,275 825,275 875,325 J4.5@875,400
  other v1: 450,2600
NetBZ1_1: BZ1.1 C24.2 R47.1 | length 376.6
  Top Layer w30: C24.2@1250,1433 1345,1433 R47.1@1350,1428 BZ1.1@1350,1625 ; BZ1.1@1335.55,1610.55 cw(c1300.67,1575.67) 1350,1575.67 cw(c1399.33,1575.67) BZ1.1@1364.45,1610.55
NetBZ1_2: BZ1.2 Q2.3 | length 371.9
  Top Layer w20: BZ1.2@1332.02,1892.98 ccw(c1288.6,1936.4) 1350,1936.4 ccw(c1411.4,1936.4) BZ1.2@1367.98,1892.98 ; BZ1.2@1334.68,1885 BZ1.2@1344.68,1875 ; BZ1.2@1350,1875 1350,2090 Q2.3@1360,2100 ; 1350,2065.36 cw(c1390.98,2065.36) Q2.3@1362,2094.34
NetC2_2: C2.2 U6.2 X1.1 | length 561.5
  Top Layer w7.87: U6.2@3093.74,910.63 3260.63,910.63 3275,925 3395,925 3429.53,890.47 X1.1@3429.53,887.6 3429.53,821.53 C2.2@3428,820 ; 3408.72,911.28 cw(c3387.02,889.57) X1.1@3417.72,889.57 ; 3410.91,909.09 ccw(c3429.53,927.71) X1.1@3429.53,901.38 ; C2.2@3419.65,830.32 ccw(c3395.8,854.17) 3429.53,854.17 ; X1.1@3421.18,877.28 cw(c3401.01,857.12) 3429.53,857.12 cw(c3458.04,857.12) X1.1@3437.88,877.28 ; 3429.53,846.79 ccw(c3452.83,846.79) C2.2@3436.35,830.32
NetC29_1: 
NetC29_2: 
NetC30_1: C30.1 L2.1 | length 69
  Top Layer w26: C30.1@3085,553 L2.1@3085,622
NetC34_1: C34.1 U6.19 | length 316.4
  Top Layer w7: C34.1@2700,1022 2748.38,973.62 U6.19@2936.26,973.62 ; C34.1@2701.97,1009.75 cw(c2701.97,984.94) 2719.52,1002.48 ; C34.1@2707.22,1022 ccw(c2724.64,1022) C34.1@2712.32,1009.68 ; C34.1@2714.22,1022 ccw(c2748.54,1022) 2724.27,997.73
NetC37_1: C37.1 U6.17 | length 257.4
  Top Layer w7: C37.1@2775,1078 2782,1078 2854.88,1005.12 U6.17@2936.26,1005.12 ; C37.1@2776.97,1065.75 cw(c2776.97,1024.04) 2806.47,1053.53 ; C37.1@2776.97,1072.75 cw(c2776.97,1047.94) 2794.52,1065.48 ; C37.1@2789.22,1078 ccw(c2806.64,1078) 2794.32,1065.68
NetC37_2: C37.2 U6.18 | length 234.9
  Top Layer w7: C37.2@2775,1022 2807.63,989.37 U6.18@2936.26,989.37 ; C37.2@2776.97,1009.75 cw(c2776.97,984.94) 2794.52,1002.48 ; C37.2@2782.22,1022 ccw(c2799.64,1022) C37.2@2787.32,1009.68 ; C37.2@2789.22,1022 ccw(c2823.54,1022) 2799.27,997.73
NetC38_2: C38.2 U6.3 X1.3 | length 494.3
  Top Layer w7.87: U6.3@3093.74,926.38 3238.98,926.38 3275,962.4 X1.3@3370.47,962.4 3372,963.93 C38.2@3372,1030 ; X1.3@3362.12,954.05 ccw(c3341.96,933.89) 3341.96,962.4 ccw(c3341.96,990.92) X1.3@3362.12,970.75 ; X1.3@3362.12,972.72 ccw(c3338.27,996.57) 3372,996.57 ; C38.2@3363.65,1019.68 cw(c3343.49,999.52) 3372,999.52 cw(c3400.51,999.52) C38.2@3380.35,1019.68 ; 3372,989.2 ccw(c3395.3,989.2) X1.3@3378.82,972.72
NetC43_1: C43.1 UB1.1 Y2.2 | length 394.7
  Top Layer w8: C43.1@1928,1386.28 cw(c1928,1353.17) 1951.42,1376.58 ; C43.1@1928,1400 1978,1350 UB1.1@2097.64,1350 ; C43.1@1939.75,1398.03 ccw(c1963.36,1398.03) 1946.66,1381.34 ; 1946.76,1381.24 ccw(c1988.78,1423.26) Y2.2@1988.78,1363.84 ; 1960.41,1367.59 ccw(c1988.78,1395.95) Y2.2@1988.78,1355.84 ; Y2.2@2010.29,1340.42 cw(c2033.42,1317.3) 2033.42,1350 ; Y2.2@2010.29,1359.82 ccw(c2033.99,1383.52) 2033.99,1350 ; UB1.1@2074.4,1344.48 ccw(c2061.06,1331.14) 2061.06,1350 ccw(c2061.06,1368.86) UB1.1@2074.4,1355.52
NetC45_2: C45.2 UB1.2 Y2.1 | length 420.6
  Top Layer w8: C45.2@1928,1245 1983,1300 UB1.2@2097.64,1300 ; C45.2@1928,1258.72 ccw(c1928,1291.83) 1951.42,1268.42 ; C45.2@1939.75,1246.97 cw(c1963.36,1246.97) 1946.66,1263.66 ; 1946.96,1263.96 cw(c1988.78,1222.14) Y2.1@1988.78,1281.28 ; 1960.62,1277.62 cw(c1988.78,1249.46) Y2.1@1988.78,1289.28 ; Y2.1@2004.63,1290.96 cw(c2026.46,1269.13) 2026.46,1300 ; Y2.1@2010.29,1285.3 cw(c2045.78,1249.81) 2045.78,1300 ; Y2.1@2010.29,1304.7 ccw(c2021.63,1316.04) 2021.63,1300 ; UB1.2@2074.4,1294.48 ccw(c2061.06,1281.14) 2061.06,1300 ccw(c2061.06,1318.86) UB1.2@2074.4,1305.52
NetD2_A: D2.A Q3.C U5.4 | length 710.4
  Top Layer w31.5: U5.4@500,2225 500,2300 550,2350 725,2350 D2.A@825,2450 825,2465 910,2550 Q3.C@979.68,2550 ; D2.A@840.75,2457.87 cw(c895.97,2457.87) 856.92,2496.92